# Altium PCB PCB1.PcbDoc
Units mil, origin at the board's own origin, x right, y up, seen from the top; angles counter-clockwise.
Board outline 6000 x 4000 mil, 2 copper layers (Top Layer, Bottom Layer); 25 components, 26 nets, 140 pads, 4 vias.
Unrouted connection lines stored in the file: 49.
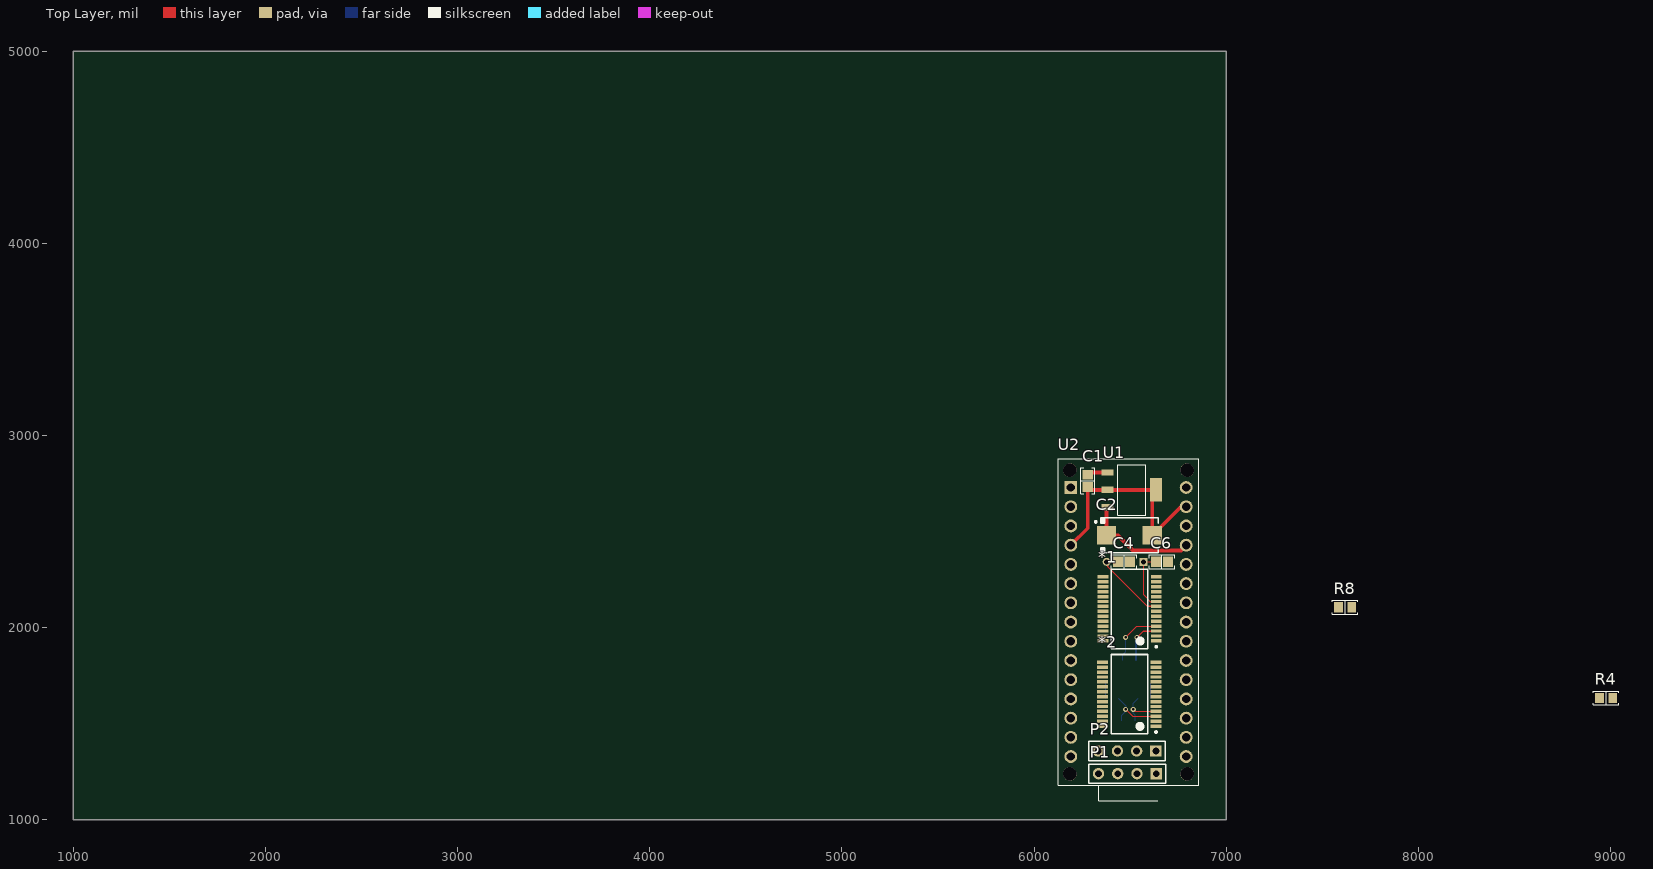
[diagram p0: Top Layer view]
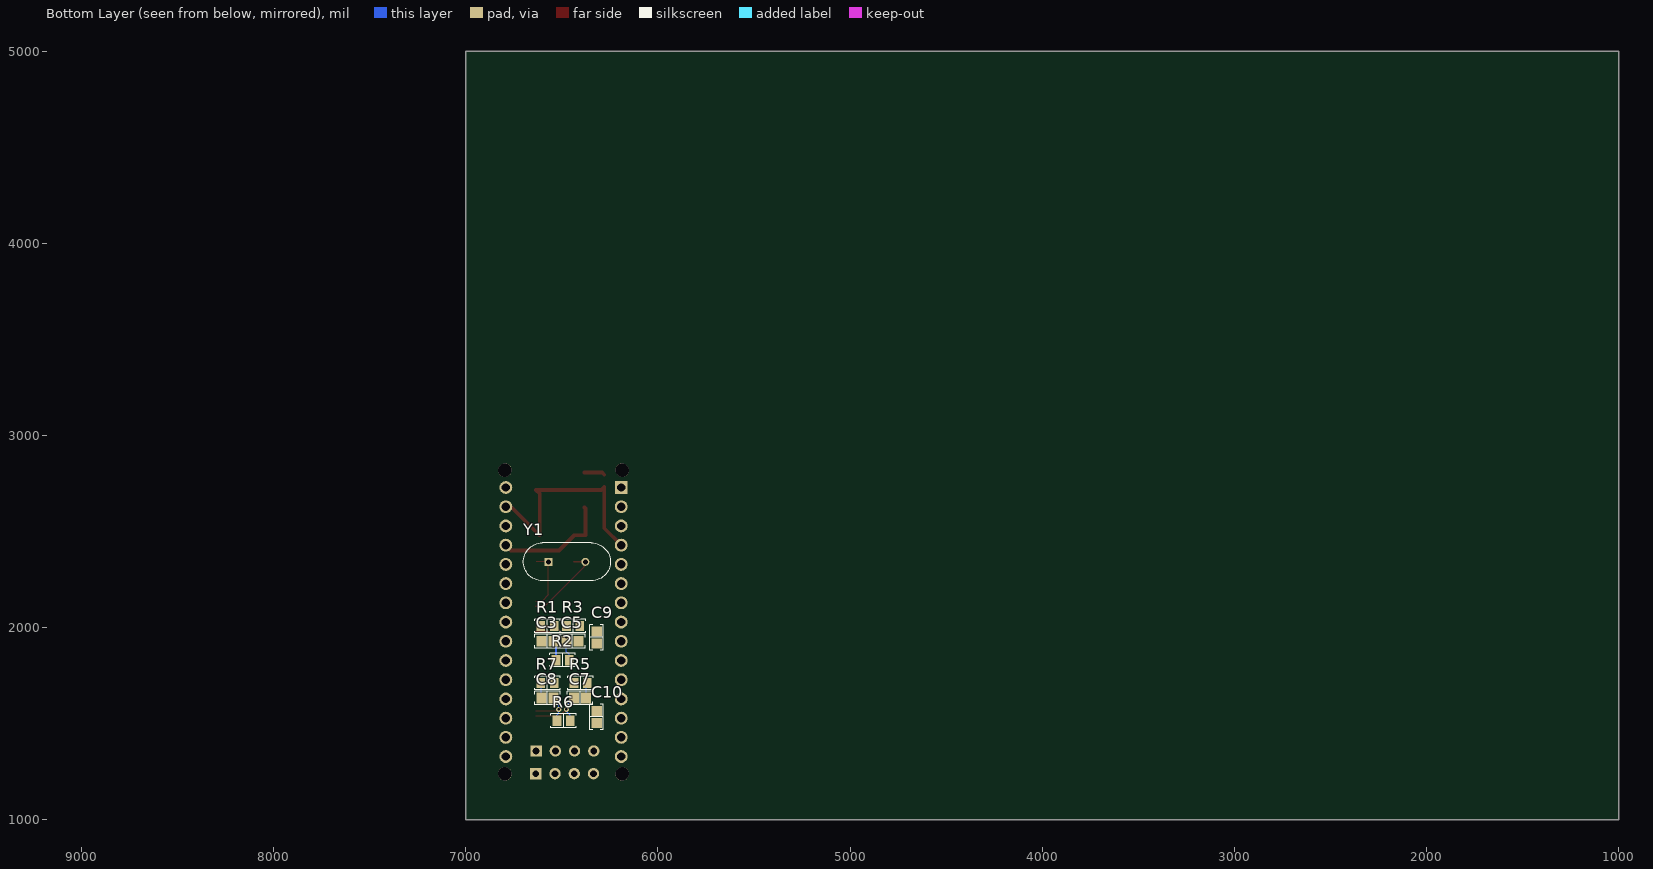
[diagram p1: Bottom Layer view, seen from below]

## Layer stack, top to bottom
Top Solder: solder mask 0.4, Solder Resist, Dk 3.5
Top Layer: signal copper 1.4
Dielectric 1: dielectric 12.6, FR-4, Dk 4.8
Bottom Layer: signal copper 1.4
Bottom Solder: solder mask 0.4, Solder Resist, Dk 3.5

## Board outline
1000,1000 7000,1000 7000,5000 1000,5000

## Design rules (kind name [scope] priority, off if disabled: settings)
BoardOutlineClearance [All] p1: gap=15 ignorepadtopadclearanceinfootprint=FALSE
Clearance [All] p1: gap=6 ignorepadtopadclearanceinfootprint=FALSE except(0: Arc-Hole Track-Hole SMDPad-Hole THPad-Hole Via-Hole Fill-Hole Poly-Hole Region-Hole Text-Hole)
ComponentClearance "ARDUINO CLEARANCE OVVERIDE" [InComponent('U2')] p1: gap=0 collisioncheckmode=3 verticalgap=0 showdistances=FALSE
ComponentClearance [All] p2: gap=1 collisioncheckmode=3 verticalgap=1 showdistances=FALSE
DiffPairsRouting [All] p1: maxlimit=393.7 minlimit=6 mostfreqgap=8 toplayer_minwidth=6 toplayer_maxwidth=15 toplayer_prefwidth=8 bottomlayer_minwidth=6 bottomlayer_maxwidth=15 bottomlayer_prefwidth=8 maxuncoupledlength=500
HoleSize [All] p1: absolutevalues=TRUE maxlimit=265 minlimit=13 maxpercent=80.000 minpercent=20.000
HoleToHoleClearance [All] p1: gap=10 allowstackedmicrovias=FALSE
MinimumAnnularRing [All] p1: minimumring=7
MinimumSolderMaskSliver [All] p1: minsoldermaskwidth=0
PlaneClearance [All] p1: clearance=10
PlaneConnect [All] p1: planeconnectstyle=Direct reliefexpansion=16 reliefentries=4 reliefconductorwidth=6 reliefairgap=6
PolygonConnect [All] p1: connectstyle=Relief reliefconductorwidth=8 reliefentries=4 polygonreliefangle="90 Angle" airgapwidth=6
RoutingCorners [All] p1: cornerstyle=45-Degree minsetback=49.21 maxsetback=49.21
RoutingVias [All] p1: holewidth=15 width=30 viastyle="Through Hole" minholewidth=13 minwidth=27 maxholewidth=100 maxwidth=114
SilkToSilkClearance [All] p1: silktosilkclearance=0
SilkToSolderMaskClearance [IsPad] p1: minsilkscreentomaskgap=6 clearancetoexposedcopper=TRUE
SolderMaskExpansion [All] p1: expansion=2.95
Width [All] p1: maxlimit=400 minlimit=6 preferedwidth=8
20 further rules are at their usual default settings.

## Classes and differential pairs
differential pair USER_CAN: +USER_CAN_P -USER_CAN_N
differential pair CAR_CAN: +CAR_CAN_P -CAR_CAN_N

## Components (designator, comment, footprint, x,y, rotation, side; value= is the part's Value field where it differs from the comment)
*1 "MCP25625" SOP65P780X200-28L 6497.05,2097.44 r180 top
*2 "MCP25625" SOP65P780X200-28L 6496.06,1653.54 r180 top
C1 ".47U" "CAP 0805/2012" 6279.53,2763.78 r90 top
C2 "22uF" "CAP POL 2917/7343" 6496.06,2480.32 r0 top
C3 "0.1uF" "CAP 0805/2012" 6574.8,1929.13 r0 bottom
C4 "0.1uF" "CAP 0805/2012" 6468.5,2342.52 r180 top
C5 "0.1uF" "CAP 0805/2012" 6444.88,1929.13 r180 bottom
C6 "0.1uF" "CAP 0805/2012" 6665.35,2342.52 r180 top
C7 "0.1uF" "CAP 0805/2012" 6405.51,1633.86 r180 bottom
C8 "0.1uF" "CAP 0805/2012" 6574.8,1633.86 r0 bottom
C9 ".47U" "CAP 0805/2012" 6318.9,1948.82 r270 bottom
C10 ".47U" "CAP 0805/2012" 6318.9,1535.43 r270 bottom
P1 "CAR HEADER" HDR1X4 6635.43,1240.16 r180 top
P2 "USER SIDE HEADER" HDR1X4 6633.86,1358.27 r180 top
R1 "1K" "RES 0805/2012" 6574.8,2007.87 r0 bottom
R2 "100" "RES 0805/2012" 6496.06,1830.71 r0 bottom
R3 "1K" "RES 0805/2012" 6441.93,2007.87 r180 bottom
R4 "10k" "RES 0805/2012" 8976.38,1633.86 r0 top
R5 "1K" "RES 0805/2012" 6402.56,1712.6 r180 bottom
R6 "100" "RES 0805/2012" 6491.14,1515.75 r180 bottom
R7 "1K" "RES 0805/2012" 6574.8,1712.6 r0 bottom
R8 "10k" "RES 0805/2012" 7618.11,2106.3 r0 top
U1 "LM2940IMP-5.0" SOT230P696X180-4N 6507.86,2716.54 r0 top
U2 "A000005" ARDUINO_A000005 6491.34,2029.13 r0 top locked
Y1 "=VALUE" XTAL_HC49P488W45L1150T500H350 6474.02,2342.52 r180 bottom

## Footprints (in the part's own frame and the unit in brackets; to place one, negate y for a bottom-side part, rotate by r counter-clockwise, add the part's x,y. Pads: shape width x height; smd on the part's side, far side on the other; paste and mask are expansions set on the pad)
ARDUINO_A000005 [mm]
  rect 1.7x1.7 hole 1.1: 1(-7.62,17.78)
  round 1.7 hole 1.1: 2(-7.62,15.24) 3(-7.62,12.7) 4(-7.62,10.16) 5(-7.62,7.62) 6(-7.62,5.08) 7(-7.62,2.54) 8(-7.62,0) 9(-7.62,-2.54) 10(-7.62,-5.08) 11(-7.62,-7.62) 12(-7.62,-10.16) 13(-7.62,-12.7) 14(-7.62,-15.24) 15(-7.62,-17.78) 16(7.62,-17.78) 17(7.62,-15.24) 18(7.62,-12.7) 19(7.62,-10.16) 20(7.62,-7.62) 21(7.62,-5.08) 22(7.62,-2.54) 23(7.62,0) 24(7.62,2.54) 25(7.62,5.08) 26(7.62,7.62) 27(7.62,10.16) 28(7.62,12.7) 29(7.62,15.24) 30(7.62,17.78)
  round 1.778 hole 1.778 unplated: None(-7.747,-20.066) None(-7.747,20.066) None(7.747,-20.066) None(7.747,20.066)
  silkscreen extent -9.27,-23.59 9.27,21.59
"CAP 0805/2012" [mm] "Chip Capacitor, 2-Leads, Body 2.00x1.20mm, IPC Medium Density"
  rect 1.3x1.4 smd: 1(-0.8,0) 2(0.8,0)
  silkscreen extent -1.7,-0.9 1.7,0.9, body extent -1,-0.64 1,0.64, height 1.26
"CAP POL 2917/7343" [mm] "Molded Capacitor, 2-Leads, Body 7.30x4.30mm, IPC Medium Density"
  rect 2.55x2.45 smd: 1(-3.025,0) 2(3.025,0)
  silkscreen extent -4.57,-2.3 3.8,2.3, body extent -3.65,-2.15 3.65,2.15, height 4.1
HDR1X4 [mm] "Connector; Header; 4 Position"
  rect 1.5x1.5 hole 0.9: 1(0,0)
  round 1.5 hole 0.9: 2(2.54,0) 3(5.08,0) 4(7.62,0)
  silkscreen extent -1.27,-1.27 8.89,1.27
"RES 0805/2012" [mm] "Chip Resistor, 2-Leads, Body 2.00x1.25mm, IPC Medium Density"
  rect 1.15x1.35 smd: 1(-0.875,0) 2(0.875,0)
  silkscreen extent -1.7,-0.9 1.7,0.9, body extent -0.95,-0.62 1.05,0.63, height 0.6
SOP65P780X200-28L [mm] "SOP, 28-Leads, Body 10.00x5.30mm, Pitch 0.65mm, IPC High Density"
  rect 1.45x0.45 smd: 1(-3.525,4.225) 2(-3.525,3.575) 3(-3.525,2.925) 4(-3.525,2.275) 5(-3.525,1.625) 6(-3.525,0.975) 7(-3.525,0.325) 8(-3.525,-0.325) 9(-3.525,-0.975) 10(-3.525,-1.625) 11(-3.525,-2.275) 12(-3.525,-2.925) 13(-3.525,-3.575) 14(-3.525,-4.225) 15(3.525,-4.225) 16(3.525,-3.575) 17(3.525,-2.925) 18(3.525,-2.275) 19(3.525,-1.625) 20(3.525,-0.975) 21(3.525,-0.325) 22(3.525,0.325) 23(3.525,0.975) 24(3.525,1.625) 25(3.525,2.275) 26(3.525,2.925) 27(3.525,3.575) 28(3.525,4.225)
  silkscreen extent -3.65,-5.25 2.4,5.25, body extent -2.8,-5.25 2.8,5.25, height 2
SOT230P696X180-4N [mil]
  rect 63x33 smd: 1(-126,91) 2(-126,0) 3(-126,-91)
  rect 63x122 smd: 4(126,0)
  silkscreen extent -73,-132 73,132
XTAL_HC49P488W45L1150T500H350 [mm]
  rect 1.06x1.06 hole 0.66: 1(-2.44,0)
  round 1.06 hole 0.66: 2(2.44,0)
  silkscreen extent -5.75,-2.5 5.75,2.5

## Part data
C1 C3 C4 C5 C6 C7 C8 C9 C10: library part Capacitor, "SMT Capacitor"
C2: library part "Polarised Capacitor", "SMT Polarised Capacitor"
P1 P2: library part "Header 4", "Header, 4-Pin", LatestRevisionDate=17-Jul-2002, LatestRevisionNote="Re-released for DXP Platform.", Publisher="Altium Limited"
R1 R2 R3 R4 R5 R6 R7 R8: library part Resistor, "SMT Resistor"
U1: "IC REG LINEAR 5V 1A SOT223-4", Package="SOT-223-4 Texas Instruments", Availability=Good, MF="Texas Instruments", MP=LM2940IMP-5.0/NOPB, Price="1.44 USD"
U2: "ARDUINO NANO BOARD", Package=None, Digi-Key_Part_Number=1050-1001-ND, Digi-Key_Purchase_URL=https://www.digikey.ca/product-detail/en/arduino/A000005/1050-1001-ND/2638989?WT.z_cid=ref_snapeda&utm_source=snapeda&utm_medium=aggregator&utm_campaign=buynow, MF=Arduino, MP=A000005
Y1: library part "Abracon Crystal ABS07", "SMT Crystal"

## Via types
v1: diameter 27, hole 13, Top Layer to Bottom Layer, 4 vias

## Nets (pads, with @x,y where several pads share a name; then routed paths per layer and width w, separated by ;. In a path a pad name is that pad's centre, name@x,y a point inside that pad or via, vN(x,y) a via of type N, cw(c..) or ccw(c..) an arc to the next point about the centre after c; other vN are vias at no path point)
12VCAR: C1.2 P1.1 P2.1 U1.1 | length 107.4
  Top Layer w20: C1.2 6291.79,2807.54 U1.1
CAR_CAN_N: *1.3 C3.1 P1.3 R2.2 | length 234.4
  Top Layer w8: v1(6535.42,1948.82) 6568.89,1982.28 *1.3
  Bottom Layer w6: C3.1@6530.51,1943.91 v1(6535.42,1948.82)
  Bottom Layer w8: R2.2 C3.1@6530.51,1943.91
CAR_CAN_P: *1.4 C5.1 P1.2 R2.1 | length 308.1
  Top Layer w6: v1(6476.36,1948.82) 6535.42,2007.87 *1.4
  Bottom Layer w6: R2.1 6461.61,1860.28 6476.36,1875.03 v1(6476.36,1948.82)
CLKOUT: *1.8 *2.9 C4.2 Y1.2 | length 422.7
  Top Layer w8: Y1.2 Y1.2@6382.68,2342.52 ; C4.2 Y1.2@6382.68,2342.52 ; *1.8 6590.55,2110.24 6382.68,2318.11 Y1.2@6382.68,2342.52
GND: *1.10 *1.26 *2.10 *2.26 C1.1 C2.2 C4.1 C6.1 C9.1 C10.1 P1.4 P2.4 R1.1 R3.1 R5.1 R7.1 U1.2 U1.4 U2.4 U2.29 | length 1182.3
  Top Layer w20: U2.4 6279.53,2517.32 C1.1 6295.28,2716.54 U1.2 U1.4 6615.16,2697.83 C2.2 6763.98,2629.13 U2.29
MISO: *1.16 *2.16 U2.15
MOSI: *1.15 *2.15 U2.14
Net*1_9: *1.9 C6.2 Y1.1 | length 316.2
  Top Layer w6: C6.2 Y1.1 6570.08,2170.08 6604.33,2135.83 *1.9
Net*1_18: *1.18 R4.1
Net*1_20: *1.20 *1.24
Net*1_21: *1.21 *1.28
Net*2_18: *2.18 R8.1
Net*2_20: *2.20 *2.24
Net*2_21: *2.21 *2.28
NetC3_2: C3.2 R1.2
NetC5_2: C5.2 R3.2
NetC7_2: C7.2 R5.2 | length 81.2
  Bottom Layer w6: R5.2 6374.02,1706.69 C7.2
NetC8_2: C8.2 R7.2 | length 80
  Bottom Layer w6: C8.2 6606.3,1709.65 R7.2
SCLK: *1.14 *2.14 U2.16
USER_CAN_N: *2.3 C7.1 P2.3 R6.2 | length 316.1
  Top Layer w6: v1(6476.36,1574.8) 6512.78,1538.39 *2.3
  Bottom Layer w6: C7.1 6476.36,1594.5 v1(6476.36,1574.8) 6476.36,1564.99 6456.69,1545.32 R6.2
USER_CAN_P: *2.4 C8.1 P2.2 R6.1 | length 257.2
  Top Layer w6: v1(6515.75,1574.8) 6526.57,1563.98 *2.4
  Bottom Layer w6: R6.1 6525.59,1545.32 6515.75,1555.17 v1(6515.75,1574.8) 6515.75,1606.3 C8.1
VCC: *1.1 *1.19 *1.27 *2.1 *2.19 *2.27 C2.1 C9.2 C10.2 R4.2 R8.2 U1.3 U2.27 | length 605.6
  Top Layer w20: U1.3 6376.97,2620.65 C2.1 6437.01,2480.32 6515.75,2401.57 6763.78,2401.57 U2.27
~CS0: *1.17 U2.7
~CS1: *2.17 U2.8
~INT0: *1.13 U2.5
~INT1: *2.13 U2.6
pads on no net: *1.2 *1.5 *1.6 *1.7 *1.11 *1.12 *1.22 *1.23 *1.25 *2.2 *2.5 *2.6 *2.7 *2.8 *2.11 *2.12 *2.22 *2.23 *2.25 U2.1 U2.2 U2.3 U2.9 U2.10 U2.11 U2.12 U2.13 U2.17 U2.18 U2.19 U2.20 U2.21 U2.22 U2.23 U2.24 U2.25 U2.26 U2.28 U2.30 U2.None